# EAGLE board Trabalho Final Circuitos (EAGLE 9.7.0)

Size 353.8 x 225.04 mm. Coordinates in mm from the lower left corner, seen from the top.
Outline: 0,0 353.8,0 353.8,225.04 0,225.04 0,0
Copper layers (1*16): Top 0.035mm / dielectric 1.5mm / Bottom 0.035mm
Design rules "default": minimum track width 6mil, minimum drill 0.35mm, track to track 6mil, track to pad 6mil, pad to pad 6mil, via to via 6mil, smd to smd 6mil, copper to edge 40mil, drill to drill 6mil, minimum pad ring 10mil, minimum via ring 8mil, stop-mask expansion 4mil, vias tented up to drill 0mil, thermal gap 10mil

## Footprints (pad centres in the part's own frame; a part is rotated, then mirrored left to right if it is on the bottom)
LEDRD254W60D565H860B_G = drill 0.981 pad 1.581: 1 -1.27,0; 2 1.27,0
LEDRD254W60D565H860B = drill 0.981 pad 1.581: 1 -1.27,0; 2 1.27,0
BATTERY-GENERIC = drill 1.118 pad 3.15 octagon: + 2.54,0; - -2.54,0
RESAD1016W63L850D250B = drill 0.83 pad 1.43: 1 -5.08,0; 2 5.08,0
SWITCH-MOMENTARY-PTH-6.5MM = drill 1.016 pad 1.88: 1 -3.251,2.261; 2 3.251,2.261; 3 -3.251,-2.261; 4 3.251,-2.261
78B04ST = drill 0.8: 1 -3.81,-3.81; 2 -1.27,-3.81; 3 1.27,-3.81; 4 3.81,-3.81; 5 3.81,3.81; 6 1.27,3.81; 7 -1.27,3.81; 8 -3.81,3.81
DIP762W53P254L1969H508Q14B = drill 0.743 pad 1.343: 1 -3.81,7.62; 2 -3.81,5.08; 3 -3.81,2.54; 4 -3.81,0; 5 -3.81,-2.54; 6 -3.81,-5.08; 7 -3.81,-7.62; 8 3.81,-7.62; 9 3.81,-5.08; 10 3.81,-2.54; 11 3.81,0; 12 3.81,2.54; 13 3.81,5.08; 14 3.81,7.62

## Placement (x,y rotation side)
D2  GREEN  [LEDRD254W60D565H860B_G]  347.74,113.32 180 top
D3  RED  [LEDRD254W60D565H860B]  347.74,131.1 180 top
P1  BATTERYGENERIC  [BATTERY-GENERIC]  8.26,216.79 180 top
R1  330  [RESAD1016W63L850D250B]  346.47,141.26 90 top
R2  330  [RESAD1016W63L850D250B]  346.47,105.7 90 top
R3  330  [RESAD1016W63L850D250B]  40.43,162.41 90 top
R4  330  [RESAD1016W63L850D250B]  167.43,162.41 90 top
R5  330  [RESAD1016W63L850D250B]  37.89,162.41 90 top
R6  330  [RESAD1016W63L850D250B]  32.81,159.87 90 top
R7  330  [RESAD1016W63L850D250B]  35.35,159.87 90 top
S1  SWITCH_MOMENTARY  [SWITCH-MOMENTARY-PTH-6.5MM]  164.89,178.92 90 top
SW1  SPST-478B04ST  [78B04ST]  36.62,178.92 0 top
SW2  SPST-478B04ST  [78B04ST]  215.66,122.21 0 top
SW3  SPST-478B04ST  [78B04ST]  215.66,65.65 0 top
U1  74HC11_PDIP  [DIP762W53P254L1969H508Q14B]  106.47,178.92 90 top
U2  74HC04_PDIP  [DIP762W53P254L1969H508Q14B]  60.75,178.92 90 top
U3  74HC08_PDIP  [DIP762W53P254L1969H508Q14B]  83.61,178.92 90 top
U4  74HC32_PDIP  [DIP762W53P254L1969H508Q14B]  129.33,178.92 90 top
U5  74HC04_PDIP  [DIP762W53P254L1969H508Q14B]  61.13,122.35 90 top
U6  74HC11_PDIP  [DIP762W53P254L1969H508Q14B]  83.99,122.35 90 top
U7  74HC04_PDIP  [DIP762W53P254L1969H508Q14B]  60.59,65.57 90 top
U8  74HC08_PDIP  [DIP762W53P254L1969H508Q14B]  129.71,122.35 90 top
U9  74HC32_PDIP  [DIP762W53P254L1969H508Q14B]  152.57,122.35 90 top
U10  74HC11_PDIP  [DIP762W53P254L1969H508Q14B]  106.85,122.35 90 top
U11  74HC11_PDIP  [DIP762W53P254L1969H508Q14B]  83.45,65.57 90 top
U12  74HC11_PDIP  [DIP762W53P254L1969H508Q14B]  106.31,65.57 90 top
U13  74HC08_PDIP  [DIP762W53P254L1969H508Q14B]  129.17,65.57 90 top
U14  74HC32_PDIP  [DIP762W53P254L1969H508Q14B]  152.03,65.57 90 top
U15  74HC04_PDIP  [DIP762W53P254L1969H508Q14B]  60.54,8.41 90 top
U16  74HC08_PDIP  [DIP762W53P254L1969H508Q14B]  83.4,8.41 90 top
U17  74HC32_PDIP  [DIP762W53P254L1969H508Q14B]  106.26,8.41 90 top
U18  74HC86_PDIP  [DIP762W53P254L1969H508Q14B]  249.95,122.21 90 top
U19  74HC04_PDIP  [DIP762W53P254L1969H508Q14B]  275.35,122.21 90 top
U20  74HC08_PDIP  [DIP762W53P254L1969H508Q14B]  300.75,122.21 90 top
U21  74HC86_PDIP  [DIP762W53P254L1969H508Q14B]  249.95,65.65 90 top
U22  74HC04_PDIP  [DIP762W53P254L1969H508Q14B]  275.35,65.65 90 top
U23  74HC08_PDIP  [DIP762W53P254L1969H508Q14B]  300.75,65.65 90 top
U24  74HC32_PDIP  [DIP762W53P254L1969H508Q14B]  323.61,122.21 90 top

## Library data of the parts
D2 = Tinkercad; CATEGORY: Opto-Electronic; SUB-CATEGORY: LED; VALUE: LED_GREEN
D3 = Tinkercad; CATEGORY: Opto-Electronic; SUB-CATEGORY: LED; VALUE: LED_RED
P1 R1-R7 S1 SW1-SW3 U1-U24 = Tinkercad

## Nets
D2_C: D2.2 R2.2
D3_C: D3.2 R1.1
P1+: P1.+ S1.1 S1.2 SW1.5 SW1.6 SW1.7 SW1.8 SW2.5 SW2.6 SW2.7 SW2.8 SW3.5 SW3.6 SW3.7 SW3.8 U1.14 U2.14 U3.14 U4.14 U5.14 U6.14 U7.14 U8.14 U9.14 U10.14 U11.14 U12.14 U13.14 U14.14 U15.14 U16.14 U17.14 U18.14 U19.14 U20.14 U21.14 U22.14 U23.14 U24.14
P1-: P1.- R1.2 R2.1 R3.1 R4.1 R5.1 R6.1 R7.1 U1.7 U2.7 U3.7 U4.7 U5.7 U6.7 U7.7 U8.7 U9.7 U10.7 U11.7 U12.7 U13.7 U14.7 U15.7 U16.7 U17.7 U18.7 U19.7 U20.7 U21.7 U22.7 U23.7 U24.7
U1_2A: R7.2 SW1.2 U1.3 U1.10 U2.3 U5.3 U7.5 U8.2 U11.9 U15.11 U16.2
U1_2B: R5.2 SW1.3 U1.4 U2.13 U5.5 U6.5 U7.3 U8.12 U10.4 U13.9 U15.9
U1_2Y: U1.6 U4.5
U2_1A: R6.2 SW1.1 U1.11 U2.1 U5.1 U6.3 U7.1 U11.3 U11.10 U12.3 U15.13 U16.1
U2_1Y: U2.2 U3.1 U3.4
U2_2Y: U2.4 U3.2
U2_4Y: U1.9 U2.8
U2_6Y: U2.12 U3.12
U3_1Y: U3.3 U4.1
U3_2B: R3.2 SW1.4 U1.5 U2.9 U3.5 U5.13 U6.9 U7.13 U8.13 U11.5 U11.13 U16.5
U3_2Y: U3.6 U4.2
U3_4B: U1.8 U3.13
U3_4Y: U3.11 U4.12
U4_1Y: U4.3 U4.4
U4_4B: U4.6 U4.13
U4_4Y: U4.11 U18.13 U21.13
U6_1A: U5.2 U6.1 U8.1
U6_1B: U5.6 U6.2 U6.10
U6_1C: U5.12 U6.13 U10.5
U6_1Y: U6.12 U9.13
U6_2Y: U6.6 U9.9
U6_3C: U5.4 U6.4 U6.11 U10.3
U6_3Y: U6.8 U9.12
U8_1Y: U8.3 U8.4
U8_2B: U8.5 U8.11
U9_1B: U9.2 U9.8
U9_1Y: U9.3 U9.4
U9_2B: U8.6 U9.5
U9_2Y: U9.6 U18.10 U21.10
U9_4Y: U9.10 U9.11
U10_2Y: U9.1 U10.6
U11_1A: U7.2 U11.1 U13.1
U11_1B: U7.4 U11.2 U12.4
U11_1Y: U11.12 U14.13
U11_2B: U7.6 U11.4 U12.5 U13.2
U11_2Y: U11.6 U14.9
U11_3C: U7.12 U11.11 U13.10
U11_3Y: U11.8 U14.12
U12_2Y: U12.6 U14.1
U13_1Y: U13.3 U13.4
U13_2Y: U13.6 U14.5
U13_3Y: U13.5 U13.8
U14_1Y: U14.3 U14.4
U14_2Y: U14.6 U18.1 U21.1
U14_3Y: U14.2 U14.8
U14_4Y: U14.10 U14.11
U15_4Y: U15.8 U16.10 U16.12
U15_5Y: U15.10 U16.9
U15_6Y: U15.12 U16.13
U16_1Y: U16.3 U16.4
U16_2Y: U16.6 U17.2
U16_3Y: U16.8 U17.12
U16_4Y: U16.11 U17.13
U17_1Y: U17.3 U18.4 U21.4
U17_4Y: U17.1 U17.11
U18_1B: SW2.3 U18.2
U18_1Y: U18.3 U19.1
U18_2B: SW2.4 U18.5
U18_2Y: U18.6 U19.3
U18_3A: SW2.2 U18.9
U18_3Y: U18.8 U19.11
U18_4A: SW2.1 U18.12
U18_4Y: U18.11 U19.13
U19_4Y: U19.8 U20.5
U20_1A: U19.2 U20.1
U20_1B: U19.4 U20.2
U20_1Y: U20.3 U20.9
U20_2A: R4.2 S1.3 S1.4 U20.4 U23.5
U20_2Y: D3.1 U20.6
U20_3Y: U20.8 U24.13
U20_4A: U19.10 U20.12
U20_4B: U19.12 U20.13
U20_4Y: U20.10 U20.11
U21_1B: SW3.3 U21.2
U21_1Y: U21.3 U22.1
U21_2B: SW3.4 U21.5
U21_2Y: U21.6 U22.3
U21_3A: SW3.2 U21.9
U21_3Y: U21.8 U22.11
U21_4A: SW3.1 U21.12
U21_4Y: U21.11 U22.13
U22_1Y: U22.2 U23.1
U22_2Y: U22.4 U23.2
U22_5Y: U22.10 U23.12
U22_6Y: U22.12 U23.13
U23_1Y: U23.3 U23.9
U23_2Y: D2.1 U23.6
U23_3Y: U23.8 U24.12
U23_4Y: U23.10 U23.11
U24_4Y: U19.9 U23.4 U24.11

## Tracks (layer width: path | path; a pad name or v marks a point on that pad's centre or on a via)
D2_C  (1 unrouted)
D3_C  (1 unrouted)
P1+  (38 unrouted)
P1-  (31 unrouted)
U1_2A  (10 unrouted)
U1_2B  (10 unrouted)
U1_2Y  (1 unrouted)
U2_1A  (11 unrouted)
U2_1Y  (2 unrouted)
U2_2Y  (1 unrouted)
U2_4Y  (1 unrouted)
U2_6Y  (1 unrouted)
U3_1Y  (1 unrouted)
U3_2B  (11 unrouted)
U3_2Y  (1 unrouted)
U3_4B  (1 unrouted)
U3_4Y  (1 unrouted)
U4_1Y  (1 unrouted)
U4_4B  (1 unrouted)
U4_4Y  (2 unrouted)
U6_1A  (2 unrouted)
U6_1B  (2 unrouted)
U6_1C  (2 unrouted)
U6_1Y  (1 unrouted)
U6_2Y  (1 unrouted)
U6_3C  (3 unrouted)
U6_3Y  (1 unrouted)
U8_1Y  (1 unrouted)
U8_2B  (1 unrouted)
U9_1B  (1 unrouted)
U9_1Y  (1 unrouted)
U9_2B  (1 unrouted)
U9_2Y  (2 unrouted)
U9_4Y  (1 unrouted)
U10_2Y  (1 unrouted)
U11_1A  (2 unrouted)
U11_1B  (2 unrouted)
U11_1Y  (1 unrouted)
U11_2B  (3 unrouted)
U11_2Y  (1 unrouted)
U11_3C  (2 unrouted)
U11_3Y  (1 unrouted)
U12_2Y  (1 unrouted)
U13_1Y  (1 unrouted)
U13_2Y  (1 unrouted)
U13_3Y  (1 unrouted)
U14_1Y  (1 unrouted)
U14_2Y  (2 unrouted)
U14_3Y  (1 unrouted)
U14_4Y  (1 unrouted)
U15_4Y  (2 unrouted)
U15_5Y  (1 unrouted)
U15_6Y  (1 unrouted)
U16_1Y  (1 unrouted)
U16_2Y  (1 unrouted)
U16_3Y  (1 unrouted)
U16_4Y  (1 unrouted)
U17_1Y  (2 unrouted)
U17_4Y  (1 unrouted)
U18_1B  (1 unrouted)
U18_1Y  (1 unrouted)
U18_2B  (1 unrouted)
U18_2Y  (1 unrouted)
U18_3A  (1 unrouted)
U18_3Y  (1 unrouted)
U18_4A  (1 unrouted)
U18_4Y  (1 unrouted)
U19_4Y  (1 unrouted)
U20_1A  (1 unrouted)
U20_1B  (1 unrouted)
U20_1Y  (1 unrouted)
U20_2A  (4 unrouted)
U20_2Y  (1 unrouted)
U20_3Y  (1 unrouted)
U20_4A  (1 unrouted)
U20_4B  (1 unrouted)
U20_4Y  (1 unrouted)
U21_1B  (1 unrouted)
U21_1Y  (1 unrouted)
U21_2B  (1 unrouted)
U21_2Y  (1 unrouted)
U21_3A  (1 unrouted)
U21_3Y  (1 unrouted)
U21_4A  (1 unrouted)
U21_4Y  (1 unrouted)
U22_1Y  (1 unrouted)
U22_2Y  (1 unrouted)
U22_5Y  (1 unrouted)
U22_6Y  (1 unrouted)
U23_1Y  (1 unrouted)
U23_2Y  (1 unrouted)
U23_3Y  (1 unrouted)
U23_4Y  (1 unrouted)
U24_4Y  (2 unrouted)